# Altium PCB VCU.PcbDoc (part 2 of 2)
Units mm, origin at the board's own origin, x right, y up, seen from the top; angles counter-clockwise.
Board outline 100 x 100 mm, 4 copper layers (Top Layer, Layer 1, Layer 2, Bottom Layer), stack 1.25 mm thick; 153 components, 112 nets, 484 pads, 403 vias.
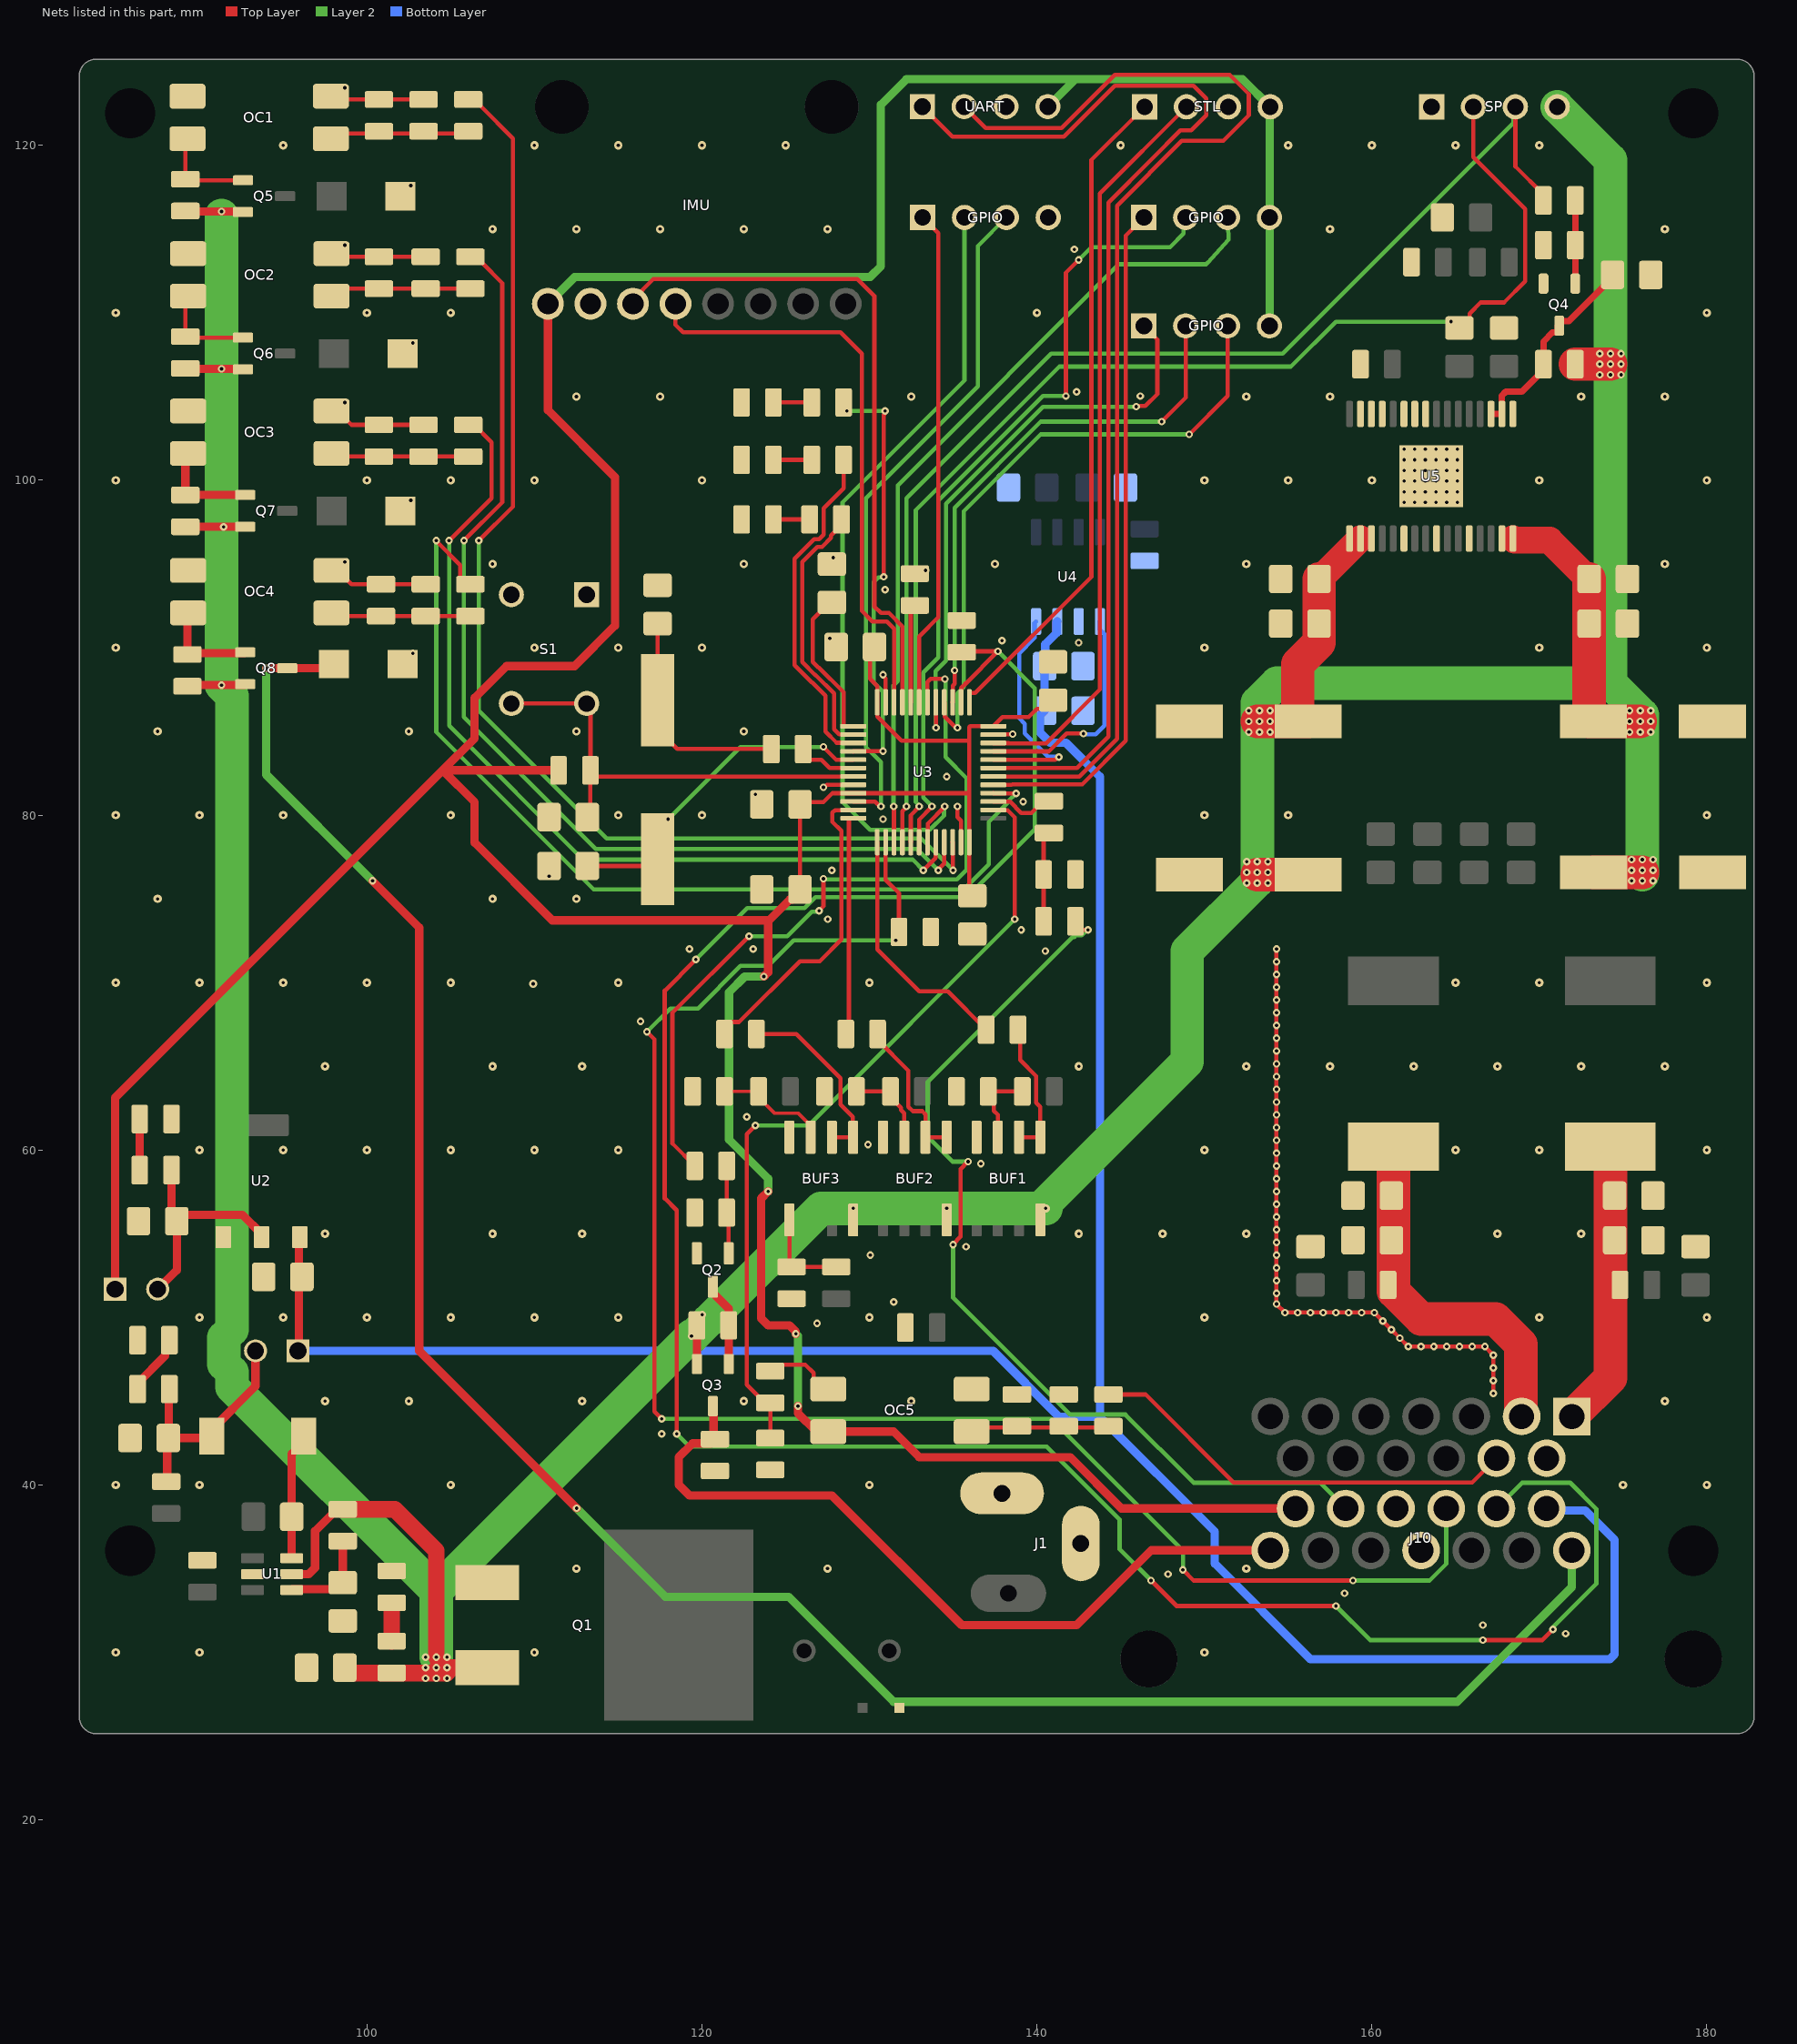
[diagram p4: the nets of this part, all layers, seen from the top]

## Via types
v1: diameter 0.45, hole 0.2, Top Layer to Bottom Layer, 265 vias
v2: diameter 0.5, hole 0.2, Top Layer to Bottom Layer, 138 vias

## Nets (pads, with @x,y where several pads share a name; then routed paths per layer and width w, separated by ;. In a path a pad name is that pad's centre, name@x,y a point inside that pad or via, vN(x,y) a via of type N, cw(c..) or ccw(c..) an arc to the next point about the centre after c; other vN are vias at no path point) (continued)
GND: BUF1.4 BUF2.4 BUF3.4 C1.2 C2.2 C4.2 C5.2 C6.2 C7.1 C8.1 C9.1 C10.1 C11.2 C12.1 C13.1 C14.1 C15.2 C16.2 C17.2 C18.2 C19.2 C21.1 C22.2 C23.2 C24.1 C25.2 C26.1 C27.2 C28.2 C29.2 C30.2 C35.2 C36.2 C37.2 C38.2 C39.2 C40.2 C60.1 D1.1 D2.K D3.K D8.K D9.K D10.K D11.K D12.K D13.A D14.A D15.A GPIO.4@140.676,115.697 IMU.GND J1.1 J1.3 J10.8 J10.17 J10.23 OC1.2 OC1.3 OC2.2 OC2.3 OC3.2 OC3.3 OC4.2 OC4.3 OC5.2 Q1.1 Q2.2 Q4.2 R3.1 R6.2 R7.1 R10.2 R11.2 R12.2 R16.2 R17.2 R20.2 R22.2 R24.1 R26.2 R28.1 R29.2 R31.2 R33.2 R35.2 R36.2@146.431,95.189 R39.1 R40.1 R41.2 R46.2 R49.2 R52.2 R55.2 R57.2 S1.1 S1.2 SP.1 STL.3 U1.2 U2.1 U3.8 U3.23 U3.35 U3.47 U4.2 U5.1 U5.9 U5.10 U5.11 U5.13 U5.14 U5.15 U5.22 U5.25 U5.28 U5.33 UART.3 | length 77.3
  Top Layer w0.25: v1(98.679,95.123) 98.387,95.123 OC4.2@97.879,94.615 98.246,94.615 99.074,93.787 D12.K@100.838,93.787 R55.2@103.505,93.787 ; v1(98.679,104.648) 98.171,104.14 OC3.2@97.879,104.14 98.246,104.14 99.074,103.312 D11.K@100.711,103.312 R52.2@103.378,103.312 ; v1(98.679,114.046) 98.171,113.538 OC2.2@97.879,113.538 98.065,113.352 103.499,113.352 R49.2@103.505,113.345 ; v1(98.679,123.444) 98.349,123.444 OC1.2@97.841,122.936 98.027,122.75 103.372,122.75 R46.2@103.378,122.743 ; D14.A@101.999,98.171 102.616,98.788 v1(102.616,98.806) ; D13.A@101.999,116.967 102.616,117.584 v1(102.616,117.602) ; D15.A@102.126,89.027 102.743,89.644 v1(102.743,89.662) ; D14.A@102.126,107.569 102.743,108.186 v1(102.743,108.204) ; C11.2@123.19,75.012 123.19,75.184 C11.2@123.571,75.565 ; v1(127.254,81.661) 127.308,81.661 127.458,81.811 U3.8@129.039,81.811 ; C14.1@127.762,94.996 127.844,95.078 v1(127.844,95.377) ; v1(130.81,88.392) 130.81,88.338 130.969,88.179 U3.47@130.969,86.741 ; R7.1@132.715,94.422 133.157,94.422 v1(133.35,94.615) ; v1(135.255,80.518) 135.255,79.88 135.469,79.666 U3.23@135.469,78.381 ; U3.35@137.399,84.811 137.411,84.824 138.545,84.824 v1(138.557,84.836) ; v1(154.305,72.009) v1(154.305,50.8) v1(154.813,50.292) v1(155.575,50.292) v1(156.337,50.292) v1(157.099,50.292) v1(157.861,50.292) v1(158.623,50.292) v1(159.385,50.292) v1(160.147,50.292) v1(160.655,49.784) v1(161.163,49.276) v1(161.671,48.768) v1(162.179,48.26) v1(162.941,48.26) v1(163.703,48.26) v1(164.465,48.26) v1(165.227,48.26) v1(165.989,48.26) v1(166.751,48.26) v1(167.259,47.752) v1(167.259,46.99) v1(167.259,46.228) v1(167.259,45.466)
  other v1: 171.577,31.115 166.624,31.623 158.369,33.528 147.828,34.671 117.602,43.053 126.873,49.657 131.445,50.927 154.305,51.435 154.305,52.197 154.305,52.959 130.048,53.721 154.305,53.721 135.763,54.229 154.305,54.483 154.305,55.245 154.305,56.007 154.305,56.769 154.305,57.531 154.305,58.293 154.305,59.055 136.652,59.182 154.305,59.817 129.921,60.325 154.305,60.579 154.305,61.341 122.682,61.976 154.305,62.103 154.305,62.865 154.305,63.627 154.305,64.389 154.305,65.151 154.305,65.913 154.305,66.675 154.305,67.437 116.332,67.691 154.305,68.199 154.305,68.961 154.305,69.723 154.305,70.485 154.305,71.247 140.505,71.882 119.253,72.009 123.063,72.009 139.065,73.152 127.508,73.787 110.871,76.357 127.762,76.708 130.81,79.756 139.176,80.799 123.19,81.25 134.62,82.296 142.494,90.297 137.922,90.424 127.635,90.551 130.937,93.472 161.925,98.679 162.56,98.679 163.195,98.679 163.83,98.679 164.465,98.679 165.1,98.679 161.925,99.314 162.56,99.314 163.195,99.314 163.83,99.314 164.465,99.314 165.1,99.314 161.925,99.949 162.56,99.949 163.195,99.949 163.83,99.949 164.465,99.949 165.1,99.949 161.925,100.584 162.56,100.584 163.195,100.584 163.83,100.584 164.465,100.584 165.1,100.584 161.925,101.219 162.56,101.219 163.195,101.219 163.83,101.219 164.465,101.219 165.1,101.219 161.925,101.854 162.56,101.854 163.195,101.854 163.83,101.854 164.465,101.854 165.1,101.854 146.177,105.029 142.367,105.283 142.24,113.792
  other v2: 85,30 90,30 110,30 150,30 112.5,35 127.5,35 152.5,35 85,40 90,40 105,40 130,40 175,40 180,40 97.5,45 102.5,45 112.844,45 122.5,45 132.5,45 177.5,45 90,50 95,50 100,50 105,50 110,50 115,50 130,50 150,50 170,50 180,50 97.5,55 107.5,55 112.844,55 142.5,55 147.5,55 152.5,55 167.5,55 172.5,55 90,60 95,60 100,60 105,60 110,60 115,60 150,60 165,60 170,60 180,60 97.5,65 107.5,65 112.844,65 142.5,65 152.5,65 157.5,65 162.5,65 167.5,65 172.5,65 177.5,65 109.927,69.927 85,70 90,70 95,70 100,70 105,70 115,70 130,70 165,70 170,70 180,70 87.5,75 107.5,75 112.5,75 85,80 90,80 95,80 105,80 115,80 120,80 150,80 155,80 180,80 87.5,85 102.5,85 112.5,85 122.5,85 85,90 110,90 115,90 120,90 150,90 170,90 180,90 107.5,95 122.5,95 137.5,95 152.5,95 177.5,95 85,100 100,100 105,100 110,100 120,100 150,100 155,100 160,100 170,100 180,100 112.5,105 117.5,105 132.5,105 152.5,105 157.5,105 172.5,105 177.5,105 85,110 100,110 105,110 140,110 180,110 107.5,115 112.5,115 117.5,115 122.5,115 127.5,115 157.5,115 177.5,115 95,120 110,120 115,120 120,120 125,120 145,120 155,120 160,120 165,120 170,120
LED5V: D3.A R5.1 | length 3.7
  Top Layer w0.5: R5.1@86.299,45.72 86.299,46.07 87.949,47.72 87.949,48.391 D3.A@88.199,48.641
LED12V: D2.A R1.1 | length 2.3
  Top Layer w1: R1.1@101.473,30.668 D2.A@101.473,32.959
NetBUF1_3: BUF1.3 R29.1 R30.1 | length 5
  Top Layer w0.25: BUF1.3@137.668,60.763 137.668,62.105 137.428,62.345 137.428,63.166 R29.1@137.094,63.5 R30.1@139.131,63.5
NetBUF2_3: BUF2.3 R31.1 R32.1 | length 5.1
  Top Layer w0.25: R31.1@129.22,63.5 R32.1@131.257,63.5 131.257,63.15 131.876,62.531 131.876,62.4 132.08,62.195 BUF2.3@132.08,60.763
NetBUF3_3: BUF3.3 R33.1 R34.1 | length 6.9
  Top Layer w0.203: R33.1@121.346,63.5 R34.1@123.383,63.5 123.383,63.15 124.327,62.206 125.734,62.206 126.492,61.448 BUF3.3@126.492,60.763
NetBUF3_5: BUF3.5 R35.1 R36.1@128.016,53.02 | length 5.5
  Top Layer w0.25: BUF3.5@125.222,55.823 125.222,53.147 R35.1@125.349,53.02 R36.1@128.016,53.02
NetC2_1: C2.1 R2.1 U1.4 | length 5.7
  Top Layer w0.5: U1.4@95.504,33.721 95.549,33.766 98.155,33.766 C2.1@98.552,34.163 R2.1@98.552,36.642
NetC60_2: C60.2 Q4.3 R37.2 U5.2 U5.3 | length 12.7
  Top Layer w0.38: U5.3@167.117,103.96 U5.2@167.767,103.96 167.767,105.06 167.99,105.283 168.945,105.283 170.246,106.584 R37.2@170.246,106.934 170.246,108.285 170.781,108.82 171.091,108.82 Q4.3@171.091,109.235 ; Q4.3@171.196,109.235 171.196,109.414 171.301,109.519 171.772,109.519 174.371,112.118 C60.2@174.371,112.268
NetD4_K: D4.K R6.1 | length 3
  Top Layer w0.5: D4.K@86.426,58.801 R6.1@86.426,61.849
NetD5_A: D5.A U3.2 | length 15.8
  Top Layer w0.25: D5.A@128.331,97.663 128.331,97.313 127.712,96.694 127.712,96.563 127.174,96.024 126.879,96.024 125.984,95.13 125.984,89.148 126.76,88.372 126.778,88.372 127.889,87.262 127.889,85.118 128.181,84.826 129.024,84.826 U3.2@129.039,84.811
NetD5_K: D5.K R10.1 | length 2.2
  Top Layer w0.25: R10.1@124.267,97.663 D5.K@126.431,97.663
NetD6_A: D6.A U3.3 | length 20.3
  Top Layer w0.25: D6.A@128.458,101.219 128.458,99.531 127.259,98.332 127.259,96.75 126.986,96.477 126.691,96.477 125.531,95.317 125.531,88.96 126.572,87.919 126.59,87.919 127.381,87.129 127.381,84.985 128.04,84.326 129.024,84.326 U3.3@129.039,84.311
NetD6_K: D6.K R11.1 | length 2.3
  Top Layer w0.25: R11.1@124.267,101.219 D6.K@126.558,101.219
NetD7_A: D7.A U3.4 | length 25.1
  Top Layer w0.25: U3.4@129.039,83.811 129.043,83.815 130.805,83.815 v1(130.81,83.82) ; v1(130.847,94.234) 130.847,103.909 130.899,103.96 130.899,104.102 v1(130.937,104.14)
  Layer 2 w0.25: v1(128.651,104.14) v1(130.937,104.14) ; v1(130.81,83.82) 130.81,87.376 130.257,87.929 130.257,93.935 130.527,94.205 130.818,94.205 v1(130.847,94.234)
NetD7_K: D7.K R12.1 | length 2.3
  Top Layer w0.25: R12.1@124.267,104.648 D7.K@126.558,104.648
NetD8_A: D8.A OC5.1 R27.1 R28.2 | length 8.7
  Top Layer w0.25: OC5.1@135.725,43.18 135.975,43.43 144.202,43.43 R27.1@144.272,43.5
NetOC1_4: OC1.4 Q5.1 R47.2 | length 5.9
  Top Layer w0.25: OC1.4@89.281,120.396 89.154,120.269 R47.2@89.154,117.983 89.22,117.917 Q5.1@92.598,117.917
NetOC2_4: OC2.4 Q6.1 R50.2 | length 6
  Top Layer w0.25: OC2.4@89.319,110.998 89.154,110.833 R50.2@89.154,108.58 89.215,108.519 Q6.1@92.598,108.519
NetOC3_4: OC3.4 Q7.1 R53.2 | length 6.1
  Top Layer w0.5: OC3.4@89.319,101.6 89.154,101.435 R53.2@89.154,99.121 Q7.1@92.725,99.121
NetOC4_4: OC4.4 Q8.1 R56.2 | length 6
  Top Layer w0.5: OC4.4@89.319,92.075 89.281,92.037 R56.2@89.281,89.596 89.363,89.678 92.68,89.678 Q8.1@92.725,89.723
NetOC5_3: OC5.3 R25.1 | length 4.1
  Top Layer w0.25: R25.1@124.079,46.797 124.429,46.797 124.819,47.187 126.168,47.187 126.666,46.689 126.666,46.219 OC5.3@127.165,45.72
NetQ2_1: Q2.1 R21.1 R22.1 | length 5.3
  Top Layer w0.25: R21.1@121.473,59.055 121.473,56.561 121.6,56.434 Q2.1@121.6,53.832
NetQ2_3: Q2.3 Q3.1 R23.1 | length 5
  Top Layer w0.5: Q2.3@120.65,51.832 120.65,51.472 121.6,50.522 Q3.1@121.6,47.214
NetQ4_1: Q4.1 R38.2 R39.2 | length 5
  Top Layer w0.38: Q4.1@172.146,111.745 R39.2@172.146,114.046 R38.2@172.146,116.713
NetR18_2: R18.2 R19.1 R20.1 | length 5.4
  Top Layer w0.25: R19.1@140.401,73.66 140.401,78.618 R18.2@140.716,78.933
OC1_1: D9.A OC1.1 R45.2 R46.1 | length 8.4
  Top Layer w0.25: OC1.1@97.841,120.396 98.154,120.709 105.912,120.709 R45.2@106.045,120.843
OC2_1: D10.A OC2.1 R48.2 R49.1 | length 8.5
  Top Layer w0.25: OC2.1@97.879,110.998 98.326,111.445 R49.1@103.505,111.445 R48.2@106.172,111.445
OC3_1: D11.A OC3.1 R51.2 R52.1 | length 8.2
  Top Layer w0.25: OC3.1@97.879,101.6 98.063,101.416 106.041,101.416 R51.2@106.045,101.412
OC4_1: D12.A OC4.1 R54.2 R55.1 | length 8.4
  Top Layer w0.25: OC4.1@97.879,92.075 98.063,91.891 106.168,91.891 R54.2@106.172,91.887
PUMP_RELAY: D15.C J10.20 Q8.3 | length 131.2
  Top Layer w0.5: v1(93.98,88.773) Q8.3@95.235,88.773 97.772,88.773 D15.C@98.026,89.027 ; v1(100.33,76.073) 103.124,73.279 103.124,48.006 v1(112.522,38.608)
  Layer 2 w0.5: v1(93.98,88.773) 93.98,82.423 v1(100.33,76.073) ; v1(112.522,38.608) 117.813,33.317 125.179,33.317 131.445,27.051 165.1,27.051 171.941,33.892 J10.20@171.941,36.091
PUPM_PWM: J10.26 Q3.3 R24.2 | length 46.9
  Top Layer w0.5: Q3.3@120.65,44.704 120.695,44.659 120.695,42.815 R24.2@120.777,42.733 120.527,42.483 119.445,42.483 118.618,41.656 118.618,40.005 119.253,39.37 127.762,39.37 135.509,31.623 142.367,31.623 146.835,36.091 J10.26@153.941,36.091
"Shut down INP": J10.9 R27.2 | length 26
  Top Layer w0.25: R27.2@144.272,45.4 146.491,45.4 151.753,40.138 165.988,40.138 J10.9@167.441,41.591
SPEAKERN: C35.1 C37.1 J10.2 L3.1 R43.1 | length 21.9
  Top Layer w2: L3.1@161.29,60.198 161.29,57.277 161.29,54.61 161.29,51.562 162.941,49.911 167.386,49.911 168.893,48.404 168.893,44.139 J10.2@168.941,44.091
SPEAKERP: C36.1 C38.1 J10.1 L2.1 R44.1 | length 17.1
  Top Layer w2: J10.1@171.941,44.091 174.244,46.394 L2.1@174.244,60.198
ST_ADC_PA5: GPIO.3@151.384,115.697 U3.15 | length 48.6
  Top Layer w0.26: v1(131.445,80.518) 131.459,80.504 131.459,78.391 U3.15@131.469,78.381
  Layer 2 w0.26: v1(131.445,80.518) 131.445,87.757 131.699,88.011 131.699,99.695 144.907,112.903 150.106,112.903 150.187,112.984 151.444,114.37 151.444,114.477 151.444,114.483 GPIO.3@151.384,115.697
ST_AMP_SDZ: R38.1 SP.3 U3.16 | length 73.5
  Top Layer w0.25: U3.16@131.969,78.381 131.969,80.226 132.207,80.464 v1(132.207,80.518) ; SP.3@168.569,122.301 168.569,118.74 170.246,117.063 R38.1@170.246,116.713
  Layer 2 w0.25: v1(132.207,80.518) 132.207,98.933 140.843,107.569 154.686,107.569 168.445,121.328 168.445,122.177 SP.3@168.569,122.301
ST_AMP_SIG: C20.1 SP.2 U3.17 | length 73.7
  Top Layer w0.25: U3.17@132.469,78.381 132.469,79.998 132.969,80.498 v1(132.969,80.518) ; C20.1@165.227,109.093 165.268,109.093 165.839,109.664 165.839,109.959 166.497,110.617 167.894,110.617 169.164,111.887 169.164,116.205 166.069,119.3 SP.2@166.069,122.301
  Layer 2 w0.25: v1(132.969,80.518) 132.969,80.572 132.77,80.771 132.77,98.226 141.332,106.788 155.175,106.788 157.861,109.474 v1(164.719,109.474)
ST_APPS1: BUF1.1 BUF1.2 R15.2 | length 7.9
  Top Layer w0.25: BUF1.2@138.938,60.763 BUF1.1@140.208,60.763 140.208,62.582 139.959,62.831 139.959,64.413 138.999,65.373 R15.2@138.999,66.929
ST_APPS2: BUF2.1 BUF2.2 R14.2 | length 8.6
  Top Layer w0.25: R14.2@130.49,66.579 132.329,64.74 132.329,62.587 132.594,62.322 133.151,62.322 133.35,62.123 BUF2.2@133.35,60.763 BUF2.1@134.62,60.763
ST_BL: R45.1 U3.22 | length 72.6
  Top Layer w0.25: R45.1@106.045,122.743 106.395,122.743 106.77,122.368 106.77,122.359 108.712,120.417 108.712,98.425 v1(106.68,96.393) ; U3.22@134.969,78.381 134.984,78.366 134.984,76.725 v1(135.001,76.708)
  Layer 2 w0.25: v1(106.68,96.393) 106.68,86.233 114.3,78.613 133.096,78.613 v1(135.001,76.708)
ST_BOOT0: R7.2 U3.44 | length 5.9
  Top Layer w0.25: U3.44@132.469,86.741 132.469,92.276 R7.2@132.715,92.522
ST_BPS: BUF3.1 BUF3.2 R13.2 | length 11.4
  Top Layer w0.25: R13.2@123.124,66.929 125.632,66.929 128.27,64.291 128.27,62.709 129.003,61.977 129.003,60.792 BUF3.1@129.032,60.763 BUF3.2@127.762,60.763
ST_CAN_RXD: U3.32 U4.4 | length 13.8
  Top Layer w0.25: U3.32@137.399,83.311 141.097,83.311 141.254,83.468 v1(141.308,83.468)
  Bottom Layer w0.25: U4.4@139.954,91.564 139.859,91.469 139.859,90.583 138.938,89.662 138.938,85.789 139.277,85.45 139.277,84.878 140.649,83.506 141.27,83.506 v1(141.308,83.468)
ST_CAN_TXD: U3.33 U4.1 | length 13.6
  Top Layer w0.25: U3.33@137.399,83.811 140.713,83.811 141.773,84.871 v1(142.783,84.871)
  Bottom Layer w0.25: v1(142.783,84.871) 142.82,84.834 143.508,84.834 144.018,85.344 144.018,90.82 143.764,91.074 U4.1@143.764,91.564
ST_CFB: R51.1 U3.20 | length 53.7
  Top Layer w0.25: v1(104.902,96.393) 107.442,98.933 107.442,102.265 106.395,103.312 R51.1@106.045,103.312 ; v1(133.223,76.708) 133.954,77.439 133.954,78.366 U3.20@133.969,78.381
  Layer 2 w0.25: v1(104.902,96.393) 104.902,85.344 112.903,77.343 132.588,77.343 v1(133.223,76.708)
ST_CFM: R48.1 U3.21 | length 63.4
  Top Layer w0.25: v1(105.791,96.393) 108.077,98.679 108.077,111.781 106.897,112.961 106.897,112.97 106.522,113.345 R48.1@106.172,113.345 ; v1(134.112,76.708) 134.112,76.762 134.469,77.119 U3.21@134.469,78.381
  Layer 2 w0.25: v1(105.791,96.393) 105.791,85.852 113.665,77.978 132.842,77.978 v1(134.112,76.708)
ST_IMD_MHS: J10.15 R17.1 U3.38 | length 144.8
  Top Layer w0.26: v1(118.491,43.053) 118.491,56.4 117.779,57.112 117.779,69.519 v1(119.634,71.374) ; U3.38@135.469,86.741 135.479,86.751 135.479,87.601 135.732,87.854 v1(137.668,89.789) 135.57,89.789 R17.1@135.509,89.728 ; v1(146.812,34.29) 148.336,32.766 v1(157.861,32.766) ; v1(166.624,30.734) 170.18,30.734 v1(170.815,31.369)
  Layer 2 w0.26: v1(118.491,43.053) 119.253,42.291 140.589,42.291 144.937,37.943 144.937,36.165 v1(146.812,34.29) ; v1(119.634,71.374) 122.714,74.454 126.13,74.454 126.783,75.107 135.826,75.107 139.877,79.158 139.877,87.58 v1(137.668,89.789) ; v1(157.861,32.766) 159.893,30.734 v1(166.624,30.734) ; J10.15@167.441,38.591 168.982,40.132 171.831,40.132 173.399,38.564 173.399,34.08 170.815,31.496 v1(170.815,31.369)
ST_IMD_OKHS: J10.16 R16.1 U3.14 | length 101.5
  Top Layer w0.25: v1(116.713,67.056) 117.158,66.611 117.158,44.386 v1(117.602,43.942) ; U3.14@130.969,78.381 130.969,76.144 131.765,75.348 R16.1@131.765,73.025 ; v1(148.717,34.925) 149.352,34.29 v1(158.877,34.29)
  Layer 2 w0.25: v1(116.713,67.056) 118.11,68.453 119.761,68.453 122.301,70.993 123.958,70.993 125.482,72.517 v1(131.572,72.517) ; v1(117.602,43.942) 140.843,43.942 148.717,36.068 v1(148.717,34.925) ; v1(158.877,34.29) 163.449,34.29 164.441,35.282 J10.16@164.441,38.591
ST_NRST: C15.1 R8.1 S1.3 S1.4 U3.7 | length 27.3
  Top Layer w0.25: S1.4@108.621,86.666 S1.3@113.121,86.666 113.345,86.442 R8.1@113.345,82.677 113.711,82.311 U3.7@129.039,82.311 ; C15.1@113.326,80.052 R8.1@113.326,82.658 ; C15.1@113.538,79.883 C15.1@113.707,80.052
ST_OSC_IN: C12.2 U3.5 Y1.1 | length 17.5
  Top Layer w0.25: C12.2@113.157,76.962 116.942,76.962 Y1.1@117.348,77.368 ; v1(127.255,84.081) 127.255,84.073 128.017,83.311 U3.5@129.039,83.311
  Layer 2 w0.25: v1(117.983,79.756) 122.301,84.074 127.248,84.074 v1(127.255,84.081)
ST_OSC_OUT: R9.1 U3.6 | length 3.6
  Top Layer w0.25: R9.1@126.045,83.947 126.045,83.687 126.42,83.312 127.127,83.312 127.628,82.811 U3.6@129.039,82.811
ST_PA0: GPIO.3@138.176,115.697 U3.10 | length 40.8
  Top Layer w0.25: U3.10@129.039,80.811 130.336,80.811 130.629,80.518 v1(130.683,80.518)
  Layer 2 w0.25: v1(130.683,80.518) 130.683,83.165 129.794,84.054 129.794,98.933 136.468,105.607 136.468,113.989 GPIO.3@138.176,115.697
ST_PA1: R13.1 U3.11 | length 18.6
  Top Layer w0.25: R13.1@121.351,66.929 121.351,67.27 121.726,67.645 122.226,67.645 125.863,71.282 127.035,71.282 128.325,72.572 128.325,79.066 127.794,79.597 127.794,80.15 127.94,80.296 129.024,80.296 U3.11@129.039,80.311
ST_PA2: R14.1 U3.12 | length 13.2
  Top Layer w0.25: R14.1@128.59,66.929 128.778,67.117 128.778,79.796 128.793,79.811 U3.12@129.039,79.811
ST_PA3: R15.1 U3.13 | length 15.7
  Top Layer w0.25: U3.13@130.469,78.381 130.469,71.969 132.969,69.469 134.686,69.469 R15.1@136.972,67.183 136.972,67.408 R15.1@136.597,67.783
ST_PA8: GPIO.1@146.384,115.697 U3.29 | length 40.7
  Top Layer w0.25: U3.29@137.399,81.811 138.492,81.811 138.53,81.849 142.713,81.849 145.302,84.438 145.302,114.615 GPIO.1@146.384,115.697
ST_PB3: GPIO.2@148.884,109.22 U3.39 | length 32.5
  Top Layer w0.25: U3.39@134.969,86.741 134.984,86.756 134.984,87.74 135.088,87.844 135.088,88.641 v1(135.083,88.646) ; v1(147.447,103.505) 148.884,104.942 GPIO.2@148.884,109.22
  Layer 2 w0.25: v1(135.083,88.646) 135.083,98.36 140.228,103.505 v1(147.447,103.505)
ST_PB4: GPIO.3@151.384,109.22 U3.40 | length 37.8
  Top Layer w0.25: U3.40@134.469,86.741 134.484,86.726 134.484,85.883 135.112,85.255 135.217,85.255 v1(135.255,85.217) ; v1(149.098,102.743) 151.384,105.029 GPIO.3@151.384,109.22
  Layer 2 w0.25: v1(135.255,85.217) 135.255,87.269 135.636,87.65 135.636,98.151 140.228,102.743 v1(149.098,102.743)
ST_PB5: GPIO.1@146.384,109.22 U3.41 | length 34.9
  Top Layer w0.25: U3.41@133.969,86.741 133.969,85.233 v1(133.985,85.217) ; v1(145.923,104.394) 145.961,104.432 146.469,104.432 147.193,105.156 147.193,108.411 GPIO.1@146.384,109.22
  Layer 2 w0.25: v1(133.985,85.217) 133.958,85.244 133.958,88.613 134.565,89.22 134.565,98.598 140.361,104.394 v1(145.923,104.394)
ST_PB14: R18.1 U3.27 | length 3.9
  Top Layer w0.25: U3.27@137.399,80.811 137.414,80.796 138.397,80.796 139.056,80.137 139.67,80.137 140.366,80.833 R18.1@140.716,80.833
ST_PUMP: R54.1 U3.28 | length 58.8
  Top Layer w0.25: v1(104.14,96.393) 104.14,96.373 105.572,94.941 105.572,94.162 105.947,93.787 R54.1@106.172,93.787 ; U3.28@137.399,81.311 137.406,81.304 138.745,81.304 v1(138.752,81.296)
  Layer 2 w0.25: v1(104.14,96.393) 104.14,84.963 113.538,75.565 135.636,75.565 137.128,77.057 137.128,79.597 138.277,80.746 138.277,80.821 v1(138.752,81.296)
ST_PUMP_PWM: R21.2 U3.42 | length 46.1
  Top Layer w0.25: R21.2@119.573,59.055 118.237,60.391 118.237,68.199 v1(122.809,72.771) ; v1(127,74.295) 127.254,74.549 v1(127.254,76.2) ; U3.42@133.469,86.741 133.469,87.949 133.651,88.131 134.506,88.131 v1(134.511,88.126)
  Layer 2 w0.25: v1(122.809,72.771) 125.095,72.771 126.551,74.227 126.878,74.227 126.946,74.295 v1(127,74.295) ; v1(127.254,76.2) 127.308,76.2 127.353,76.155 135.23,76.155 135.808,76.733 135.808,82.205 134.538,83.475 134.538,88.099 v1(134.511,88.126)
ST_PWM2: GPIO.1@133.176,115.697 U3.43 | length 29.8
  Top Layer w0.25: U3.43@132.969,86.741 132.969,90.678 134.112,91.821 134.112,114.761 GPIO.1@133.176,115.697
ST_PWM3: GPIO.2@148.884,115.697 U3.18 | length 47.9
  Top Layer w0.25: U3.18@132.969,78.381 132.969,79.736 133.731,80.498 v1(133.731,80.518) ; v1(141.732,105.029) 141.732,112.395 v1(142.494,113.157)
  Layer 2 w0.25: v1(133.731,80.518) 133.731,80.538 133.223,81.046 133.223,88.519 134.112,89.408 134.112,98.786 140.355,105.029 v1(141.732,105.029) ; v1(142.494,113.157) 143.256,113.919 147.955,113.919 148.76,114.724 148.76,115.573 GPIO.2@148.884,115.697
ST_PWM4: GPIO.2@135.676,115.697 U3.19 | length 48.2
  Top Layer w0.25: U3.19@133.469,78.381 133.484,78.396 133.484,79.489 134.493,80.498 v1(134.493,80.518)
  Layer 2 w0.25: v1(134.493,80.518) 134.455,80.48 134.455,79.972 133.604,79.121 130.048,79.121 128.397,80.772 128.397,98.679 135.676,105.958 GPIO.2@135.676,115.697
ST_RTD_BTN: J10.18 R19.2 | length 58.3
  Top Layer w0.26: v1(135.001,54.356) 135.001,54.383 135.445,54.828 135.445,58.864 v1(135.89,59.309) ; R19.2@141.986,74.041 142.301,73.726 R19.2@142.301,73.66 142.301,73.522 142.671,73.152 v1(143.045,73.152)
  Layer 2 w0.26: v1(135.001,54.356) 135.001,51.181 141.986,44.196 145.288,44.196 149.351,40.133 156.899,40.133 J10.18@158.441,38.591 ; v1(135.89,59.309) 134.963,59.309 133.477,60.795 133.477,64.065 142.122,72.71 142.222,72.71 142.328,72.816 142.657,72.816 142.994,73.152 v1(143.045,73.152)
ST_SCL: IMU.SCL U3.45 | length 40.8
  Top Layer w0.25: IMU.SCL@115.883,110.541 115.883,110.803 117.094,112.014 129.286,112.014 130.294,111.006 130.294,92.464 130.683,92.075 131.167,92.075 131.969,91.273 U3.45@131.969,86.741
ST_SDA: IMU.SDA U3.46 | length 35.2
  Top Layer w0.25: IMU.SDA@118.423,110.541 118.423,109.288 118.872,108.839 128.27,108.839 129.54,107.569 129.54,92.202 130.175,91.567 131.034,91.567 131.469,91.132 U3.46@131.469,86.741
ST_SDC_SEN: R25.2 R26.1 U3.26 | length 47.8
  Top Layer w0.25: v1(123.19,61.468) 123.19,61.459 122.682,60.951 122.682,45.974 123.354,45.302 123.354,45.272 123.729,44.897 R25.2@124.079,44.897 R26.1@124.079,42.799 ; U3.26@137.399,80.311 137.414,80.296 138.257,80.296 138.684,79.869 v1(138.684,73.787)
  Layer 2 w0.25: v1(123.19,61.468) 126.365,61.468 v1(138.684,73.787)
ST_SWCLK: STL.1 U3.37 | length 40.1
  Top Layer w0.25: U3.37@135.969,86.741 135.969,87.284 135.984,87.299 136.321,87.299 143.256,94.234 143.256,119.126 STL.1@146.431,122.301
ST_SWDIO: STL.2 U3.34 | length 44.6
  Top Layer w0.25: U3.34@137.399,84.311 137.414,84.296 138.315,84.296 138.328,84.283 140.544,84.283 143.764,87.503 143.764,117.134 STL.2@148.931,122.301
ST_UART_RXD: U3.31 UART.1 | length 67.8
  Top Layer w0.25: UART.1@133.156,122.318 134.951,120.523 141.605,120.523 144.653,123.571 149.352,123.571 150.114,122.809 150.114,121.793 149.213,120.892 148.572,120.892 146.866,119.186 144.272,116.592 144.272,84.689 142.394,82.811 U3.31@137.399,82.811
ST_UART_TXD: U3.30 UART.2 | length 70.9
  Top Layer w0.25: UART.2@135.656,122.318 136.943,121.031 141.472,121.031 144.647,124.206 151.511,124.206 152.654,123.063 152.654,121.793 151.13,120.269 148.652,120.269 144.78,116.397 144.78,84.556 142.535,82.311 U3.30@137.399,82.311
ST_VBAT: C14.2 U3.1 | length 9.3
  Top Layer w0.25: C14.2@127.762,92.71 127.639,92.71 126.619,91.69 126.619,89.154 126.947,88.826 126.966,88.826 128.454,87.337 128.454,85.326 128.469,85.311 U3.1@129.039,85.311
SW: C3.2 L1.2 U1.6 | length 7.5
  Top Layer w0.5: U1.6@95.504,35.682 C3.2@95.504,38.1 95.504,41.858 96.222,42.576 L1.2@96.222,42.926
VCC3V3: C7.2 C8.2 C9.2 C10.2 C11.1 GPIO.4@153.884,109.22 GPIO.4@153.884,115.697 IMU.VCC J10.19 OC5.4 R8.2 STL.4 U3.9 U3.24 U3.36 U3.48 UART.4 VCC3V3.1 | length 286.4
  Top Layer w0.25: C11.1@125.857,75.565 125.857,80.772 127.254,80.772 127.793,81.311 U3.9@129.039,81.311 135.938,81.311 135.969,81.28 ; C7.2@130.302,90.043 130.048,89.789 130.048,88.138 130.469,87.717 U3.48@130.469,86.741 130.484,86.726 130.484,85.883 131.912,84.455 135.969,84.455 ; C9.2@136.144,75.184 135.969,75.359 U3.24@135.969,78.381 135.969,81.28 ; C8.2@140.462,86.741 140.462,86.568 140.249,86.354 140.006,86.354 139.768,86.116 139.503,85.852 137.94,85.852 U3.36@137.399,85.311 136.017,85.311 135.969,85.263 135.969,84.455 ; 135.969,81.28 135.969,84.455
  Top Layer w0.5: VCC3V3.1@84.963,51.689 84.963,63.119 104.521,82.677 ; IMU.VCC@110.803,110.541 110.803,104.19 114.808,100.185 114.808,91.313 112.395,88.9 108.331,88.9 106.426,86.995 106.426,84.582 104.521,82.677 ; R8.2@111.445,82.677 104.521,82.677 ; v1(123.698,70.358) 123.952,70.612 123.952,73.66 125.257,74.965 125.407,74.965 125.857,75.415 C11.1@125.857,75.565 ; v1(123.952,57.531) 123.529,57.108 123.529,49.953 123.952,49.53 125.222,49.53 125.603,49.149 v1(125.603,49.022) ; 123.952,73.72 111.065,73.72 106.426,78.359 106.426,80.772 104.521,82.677 ; v1(125.73,44.704) 125.725,44.699 125.725,44.285 126.83,43.18 OC5.4@127.211,43.18 ; OC5.4@128.1,43.18 131.445,43.18 132.969,41.656 141.986,41.656 145.051,38.591 J10.19@155.441,38.591
  Layer 2 w0.5: IMU.VCC@110.803,110.541 112.403,112.141 130.048,112.141 130.683,112.776 130.683,122.428 132.207,123.952 142.29,123.952 ; v1(123.698,70.358) 122.555,70.358 121.613,69.416 121.613,60.624 123.952,58.285 v1(123.952,57.531) ; v1(125.603,49.022) 125.73,48.895 v1(125.73,44.704) ; UART.4@140.656,122.318 142.29,123.952 ; GPIO.4@153.884,109.22 153.908,109.244 153.908,122.277 STL.4@153.931,122.301 152.28,123.952 142.29,123.952
VCC3V3L: C6.1 D4.A U2.2 VCC3V3.2 | length 13.5
  Top Layer w0.5: VCC3V3.2@87.503,51.689 88.646,52.832 C6.1@88.646,55.753 88.326,56.073 D4.A@88.326,58.801 ; C6.1@88.646,55.903 88.877,56.134 92.556,56.134 93.704,54.986 U2.2@93.704,54.796
VCC5V: C5.1 C18.1 C19.1 J10.14 U2.3 U4.3 VCC5V.1 | length 155.9
  Top Layer w0.5: VCC5V.1@95.885,48.006 95.94,48.061 95.94,54.741 U2.3@95.994,54.796
  Bottom Layer w0.5: VCC5V.1@95.885,48.006 137.383,48.006 141.32,44.069 143.764,44.069 ; U4.3@141.224,91.564 141.174,91.514 141.174,90.882 140.499,90.207 140.499,88.937 C19.1@140.462,88.9 C18.1@140.462,86.233 140.19,85.961 140.19,84.926 140.788,84.328 141.732,84.328 143.764,82.296 143.764,44.069 ; J10.14@170.441,38.591 170.563,38.469 172.732,38.469 174.498,36.703 174.498,29.884 174.205,29.591 156.337,29.591 150.622,35.306 150.622,37.211 143.764,44.069
VCC5VB: C4.1 L1.1 R4.2 R5.2 VCC5V.2 | length 14.4
  Top Layer w0.5: R4.2@88.011,40.193 88.075,40.257 88.075,42.735 C4.1@88.138,42.799 ; R5.2@88.199,45.72 88.169,45.689 88.169,42.83 C4.1@88.138,42.799 ; VCC5V.2@93.345,48.006 93.345,45.899 90.722,43.276 L1.1@90.722,42.926 90.595,42.799 C4.1@88.138,42.799
VCC12V: BUF1.8 BUF2.8 BUF3.8 C1.1 C23.1 C24.2 C25.1 C26.2 C27.1 C28.1 C29.1 C30.1 Q1.3 Q3.2 Q5.2 Q6.2 Q7.2 Q8.2 R1.2 R2.2 R23.2 R37.1 R47.1 R50.1 R53.1 R56.1 SP.4 U1.5 U5.17 U5.18 U5.19 U5.31 U5.32 | length 327.8
  Top Layer w0.5: R53.1@89.154,97.221 v1(91.44,97.221) Q7.2@92.725,97.221 ; R50.1@89.154,106.68 89.185,106.649 v1(91.313,106.649) 92.568,106.649 Q6.2@92.598,106.619 ; R47.1@89.154,116.083 89.187,116.05 v1(91.313,116.05) 92.565,116.05 Q5.2@92.598,116.017 ; R56.1@89.281,87.696 89.363,87.778 92.68,87.778 Q8.2@92.725,87.823 ; U1.5@95.504,34.671 96.52,34.671 96.901,35.052 96.901,37.241 98.202,38.542 R2.2@98.552,38.542 ; Q3.2@119.7,47.214 R23.2@119.7,49.53
  Top Layer w1: R2.2@98.552,38.542 101.666,38.542 104.14,36.068 v1(104.14,29.718) ; C1.1@98.679,29.083 98.679,28.968 98.879,28.768 R1.2@101.473,28.768 104.775,28.768 ; 104.267,29.337 104.521,29.083 v1(104.775,29.083) Q1.3@107.188,29.083
  Top Layer w1.6: C24.2@156.845,94.107 156.895,94.107 159.308,96.52 U5.18@159.317,96.52 ; U5.32@168.417,96.52 168.517,96.42 170.611,96.42 172.924,94.107 C25.1@172.974,94.107
  Top Layer w2: v1@153.162,76.454 C28.1@156.204,76.454 ; v1@153.162,85.598 v1(153.289,85.598) v1(153.924,85.598) C29.1@155.575,85.598 ; C29.1@156.204,85.598 C29.1@155.575,85.598 ; C24.2@156.845,94.107 C26.2@156.845,91.44 156.845,90.297 155.575,89.027 C29.1@155.575,85.598 ; R37.1@172.146,106.934 v1(173.609,106.934) v1(174.244,106.934) ; C25.1@172.974,94.107 C23.1@172.974,91.44 172.974,85.598 C30.1@173.234,85.598 v1(175.387,85.598) v1(176.022,85.598) ; C27.1@173.24,76.581 v1@176.149,76.581
  Layer 2 w2: 91.313,115.824 v1(91.313,106.649) 91.313,97.221 v1(91.313,87.757) 91.948,87.122 91.948,49.279 91.457,48.788 91.457,47.224 91.948,46.733 91.948,45.847 104.14,33.655 ; v1(104.14,29.718) 104.14,33.655 ; v1(119.38,48.895) 104.14,33.655 ; v1@119.432,48.843 120.385,49.795 127.104,56.515 v2(129.032,56.515) v2(134.62,56.515) 140.369,56.515 v2(140.53,56.515) ; v2@140.369,56.676 148.971,65.278 148.971,71.882 153.162,76.073 v1(153.162,76.581) v1(153.162,77.216) 153.162,85.598 153.162,86.712 154.334,87.884 174.244,87.884 ; SP.4@171.069,122.301 174.244,119.126 v1(174.244,107.569) v1(174.244,106.934) v1(174.244,106.299) 174.244,87.884 ; 176.149,76.454 v1(176.149,76.708) v1(176.149,77.343) 176.149,84.963 176.149,85.979 174.244,87.884
  other v1: 103.505,28.448 104.14,28.448 104.775,28.448 103.505,29.083 104.14,29.083 103.505,29.718 104.775,29.718 120.015,50.165 152.527,75.946 153.162,75.946 153.797,75.946 175.514,76.073 176.149,76.073 176.784,76.073 152.527,76.581 153.797,76.581 175.514,76.708 176.784,76.708 152.527,77.216 153.797,77.216 175.514,77.343 176.784,77.343 152.654,84.963 153.289,84.963 153.924,84.963 175.387,84.963 176.022,84.963 176.657,84.963 152.654,85.598 176.657,85.598 152.654,86.233 153.289,86.233 153.924,86.233 175.387,86.233 176.022,86.233 176.657,86.233 173.609,106.299 174.879,106.299 174.879,106.934 173.609,107.569 174.879,107.569
XTAL: C13.2 R9.2 Y1.2 | length 13.6
  Top Layer w0.25: C13.2@117.348,91.44 Y1.2@117.348,86.868 117.348,85.118 118.519,83.947 R9.2@124.145,83.947
pads on no net: IMU. IMU.AD0 IMU.INT IMU.XCL IMU.XDA J10. U2.4 U4.5 U5.16

## Polygon pours and split planes (outlines as drawn)
GND on Top Layer "NONET_L01_P-001" (solid, remove dead copper, pour order 0): 184.912,23.876 184.531,23.495 81.661,23.495 81.661,126.111 80.645,127.127 184.404,127.127
GND on Layer 1 "NONET_L01_P-001" (solid, remove dead copper, pour order 1): 187.071,128.651 187.071,21.971 185.293,20.193 76.581,20.193 76.581,125.857 79.248,128.524
GND on Layer 2 "NONET_L01_P-001" (solid, remove dead copper, pour order 2): 188.722,130.81 189.484,130.048 189.484,18.923 74.422,18.923 75.057,19.558 75.057,129.921
GND on Bottom Layer "NONET_L01_P-001" (solid, remove dead copper, pour order 5): 185.674,22.86 79.883,22.86 79.883,127.254 79.629,127.508 184.912,127.508 185.674,126.746 185.674,124.714

## Other copper
Top Layer:
  rectangle net GND: 161.481,98.171 165.481,102.171
  rectangle net VCC12V: 152.146,84.582 154.178,86.614
  rectangle net VCC12V: 152.146,75.438 154.051,77.47
  rectangle net VCC12V: 175.133,75.565 177.165,77.597
  rectangle net VCC12V: 175.006,84.582 177.038,86.614
  rectangle net VCC12V: 173.101,105.918 175.26,107.95
  rectangle net VCC12V: 103.124,28.067 105.791,30.099
  rectangle net VCC12V: 167.64,95.758 168.529,97.282
  rectangle net VCC12V: 158.496,95.758 160.147,97.282
Layer 2:
  rectangle net VCC12V: 103.124,28.067 105.156,30.607

## Silkscreen, mask and mechanical layers (free items; w line width, h text height)
Top Overlay:
  drawing of 397 lines, arcs and shapes, not listed
  text "VCU" at 109.476,98.917 h4
  text "Ibraam Robil" at 83.566,79.248 h2
  text "Yousef Osama" at 83.866,76.246 h2
  text "VCU" at 101.729,58.023 h4
Bottom Overlay:
  drawing of 137 lines, arcs and shapes, not listed
  text "DIO" at 149.479,121.031 h1 r90
  text "3.3V" at 154.305,121.031 h1 r90
  text "3.3V" at 141.224,120.904 h1 r90
  text "CLK" at 146.812,120.904 h1 r90
  text "12V" at 171.577,120.777 h1 r90
  text "TX" at 136.271,120.65 h1 r90
  text "-" at 151.884,120.65 h1 r90
  text "RX" at 133.604,120.523 h1 r90
  text "SIG" at 166.624,120.523 h1 r90
  text "SDZ" at 169.164,120.523 h1 r90
  text "-" at 138.803,120.396 h1 r90
  text "-" at 163.949,120.396 h1 r90
  text "3.3V" at 154.432,114.3 h1 r90
  text "PA0" at 138.684,114.173 h1 r90
  text "PA5" at 151.892,114.173 h1 r90
  text "-" at 141.216,114.046 h1 r90
  text "PA8" at 146.939,114.046 h1 r90
  text "PB0" at 149.479,114.046 h1 r90
  text "PB7" at 133.477,113.919 h1 r90
  text "PB1" at 136.144,113.665 h1 r90
  text "PB5" at 146.939,107.823 h1 r90
  text "PB3" at 149.479,107.696 h1 r90
  text "PB4" at 151.638,107.569 h1 r90
  text "3.3V" at 154.559,107.315 h1 r90
  text "VCU" at 142.806,59.785 h9
  text "DTI_APPS2" at 155.956,55.412 h1
  text "DTI_APPS1" at 164.973,55.412 h1
  text "CAN_H" at 170.815,55.412 h1
  text "SP-" at 174.371,55.372 h1
  text "SP+" at 178.054,55.372 h1
  text "DTI_RTD" at 138.811,55.285 h1
  text "DTI_BPS" at 146.431,55.285 h1
  text "SDC_SEN" at 174.371,53.253 h1
  text "BPS" at 136.525,53.213 h1
  text "APPS2" at 145.415,53.213 h1
  text "APPS1" at 153.797,53.213 h1
  text "CAN_L" at 163.195,53.126 h1
  text "-" at 177.038,53.094 h1
  text "RTD_BTN" at 146.304,51.094 h1
  text "3.3V" at 136.398,51.054 h1
  text "-" at 152.146,51.062 h1
  text "5V" at 177.419,51.054 h1
  text "IMD_OKHZ" at 164.592,50.967 h1
  text "IMD_MHS" at 174.244,50.967 h1
  text "BL_RL" at 170.053,48.935 h1
  text "PUMP_RL" at 178.054,48.935 h1
  text "12V" at 145.034,48.895 h1
  text "PUMP_PWM" at 140.081,48.808 h1
  text "CFM_RL" at 152.4,48.808 h1
  text "CFB_RL" at 163.957,48.808 h1
  text "-" at 154.813,48.776 h1
Mechanical 1:
  the board outline again, w0.5

## Text inside footprints (layer, text, board x,y; h text height)
D2: Mechanical 13 "+" at 102.473,32.142 h1 r270
D3: Mechanical 13 "+" at 89.016,49.641 h1
D4: Mechanical 13 "+" at 89.143,59.801 h1
D5: Mechanical 13 "+" at 129.148,98.663 h1
D6: Mechanical 13 "+" at 129.275,102.219 h1
D7: Mechanical 13 "+" at 129.275,105.648 h1
D8: Mechanical 13 "+" at 139.811,42.683 h1 r270
D9: Mechanical 13 "+" at 101.711,120.026 h1 r270
D10: Mechanical 13 "+" at 101.711,110.628 h1 r270
D11: Mechanical 13 "+" at 101.711,100.595 h1 r270
D12: Mechanical 13 "+" at 101.838,91.07 h1 r270